# EAGLE board NitroxAnalyzer - Copie (EAGLE 7.3.0)
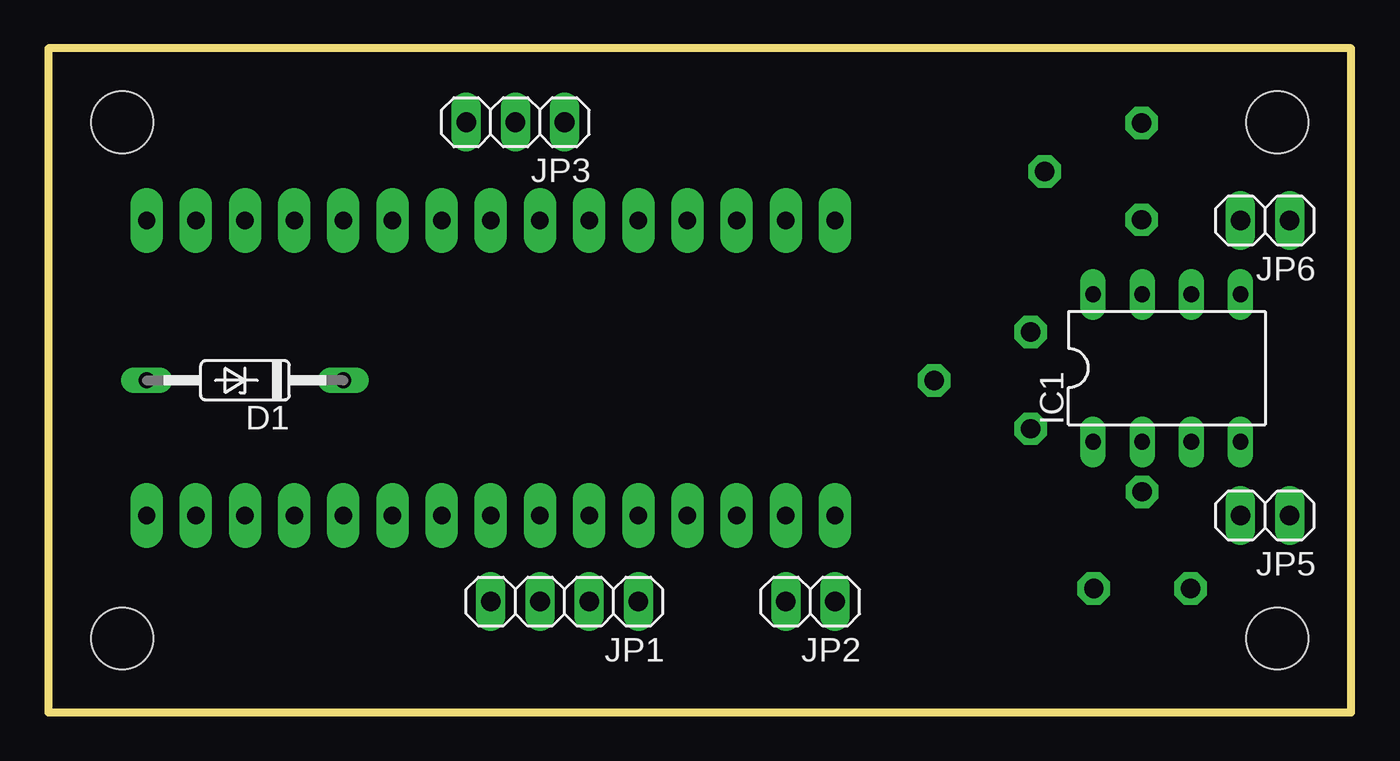
[diagram p0: board, top side]
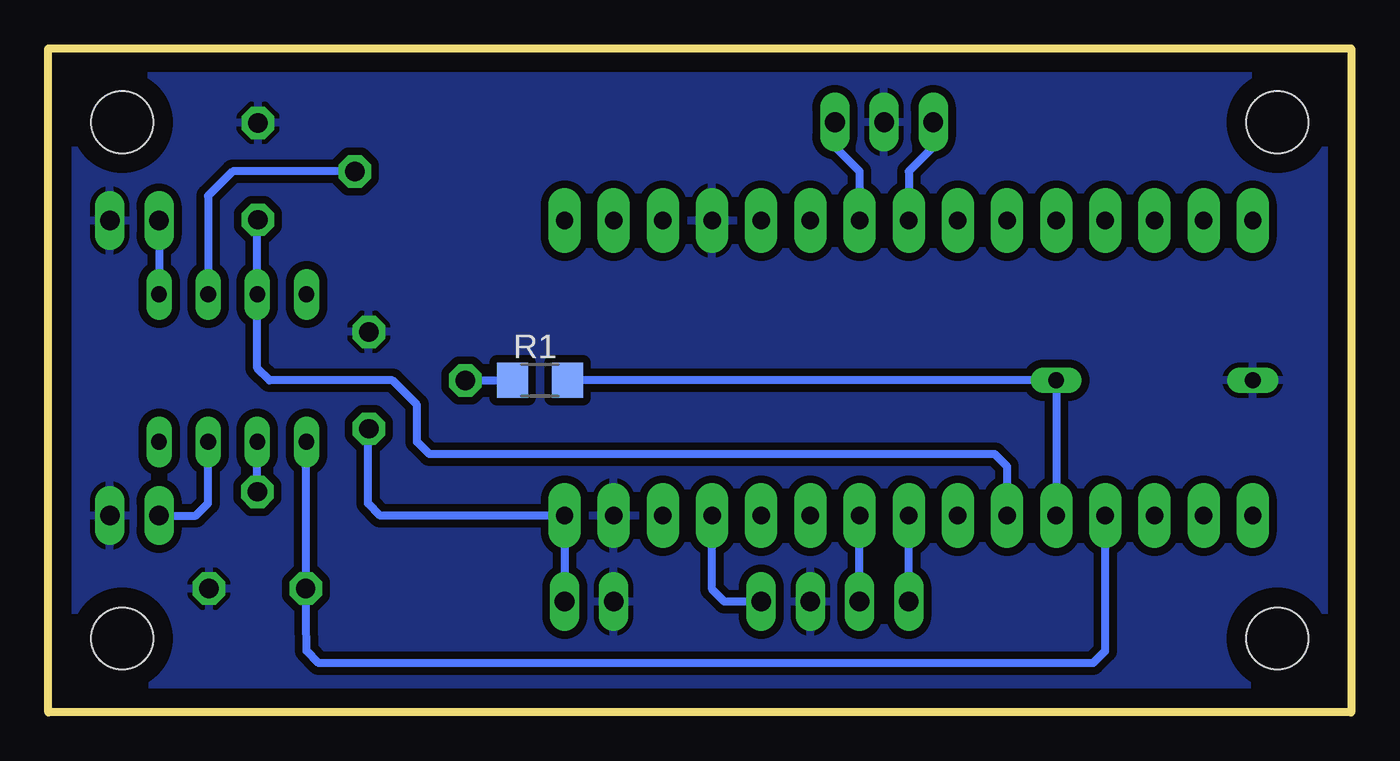
[diagram p1: board, bottom side, seen from below]

Size 67.31 x 34.29 mm. Coordinates in mm from the lower left corner, seen from the top.
Outline: 67.31,0 67.31,34.29 0,34.29 0,0 67.31,0
Copper layers (1*16): Top 0.035mm / dielectric 1.5mm / Bottom 0.035mm
Design rules "default *": minimum track width 10mil, minimum drill 24mil, track to track 16mil, track to pad 16mil, pad to pad 16mil, via to via 16mil, smd to smd 8mil, copper to edge 40mil, drill to drill 8mil, minimum pad ring 10mil, minimum via ring 8mil, stop-mask expansion 4mil, vias tented up to drill 0mil, thermal gap 10mil
Holes 3.2 mm at 3.81,30.48 3.81,3.81 63.5,3.81 63.5,30.48

## Footprints (pad centres in the part's own frame; a part is rotated, then mirrored left to right if it is on the bottom)
DO35Z10 = drill 0.813 long: A 5.08,0; C -5.08,0
DIL08 = drill 0.813 long: 1 -3.81,-3.81; 2 -1.27,-3.81; 3 1.27,-3.81; 4 3.81,-3.81; 5 3.81,3.81; 6 1.27,3.81; 7 -1.27,3.81; 8 -3.81,3.81
1X04 = drill 1.016 long: 1 -3.81,0; 2 -1.27,0; 3 1.27,0; 4 3.81,0
1X02 = drill 1.016 long: 1 -1.27,0; 2 1.27,0
1X03 = drill 1.016 long: 1 -2.54,0; 2 0,0; 3 2.54,0
R1206 = smd 1.6 x 1.803: 1 -1.422,0; 2 1.422,0
PT6KV = drill 1 pad 1.676 octagon: A -2.5,-2.5; B 2.5,-2.5; C 0,2.5
DIL30 = drill 0.9 pad 1.676 long: P$1 -7.62,17.78; P$2 -7.62,15.24; P$3 -7.62,12.7; P$4 -7.62,10.16; P$5 -7.62,7.62; P$6 -7.62,5.08; P$7 -7.62,2.54; P$8 -7.62,0; P$9 -7.62,-2.54; P$10 -7.62,-5.08; P$11 -7.62,-7.62; P$12 -7.62,-10.16; P$13 -7.62,-12.7; P$14 -7.62,-15.24; P$15 -7.62,-17.78; P$16 7.62,-17.78; P$17 7.62,-15.24; P$18 7.62,-12.7; P$19 7.62,-10.16; P$20 7.62,-7.62; P$21 7.62,-5.08; P$22 7.62,-2.54; P$23 7.62,0; P$24 7.62,2.54; P$25 7.62,5.08; P$26 7.62,7.62; P$27 7.62,10.16; P$28 7.62,12.7; P$29 7.62,15.24; P$30 7.62,17.78

## Placement (x,y rotation side)
D1  BZX55  [DO35Z10]  10.16,17.14 180 top
IC1  [DIL08]  57.78,17.78 0 top
JP1  OLED_CON  [1X04]  26.67,5.71 180 top
JP2  BAT_CON  [1X02]  39.37,5.71 180 top
JP3  BUTTONS_CON@1  [1X03]  24.13,30.48 180 top
JP5  O2_CELL_CON  [1X02]  62.87,10.16 180 top
JP6  FLUX_SENSOR_CON  [1X02]  62.87,25.4 180 top
R1  10k  [R1206]  41.91,17.14 0 bottom
U$1  PT6KV-10k  [PT6KV]  48.26,17.14 90 top
U$2  PT6KV-10k  [PT6KV]  56.52,8.89 0 top
U$3  PT6KV-10k  [PT6KV]  53.98,27.94 90 top
U$4  DIL30  [DIL30]  22.86,17.78 270 top

## Library data of the parts
D1 = diode
IC1 = linear
JP1-JP3 JP5 JP6 = pinhead
R1 = rcl
U$1-U$3 = piher
U$4 = ic-package

## Nets
+9V: JP2.1 U$1.A U$4.P$30
BATTERY_ANALOG: D1.C R1.2 U$4.P$20
CALIBRATE: JP3.3 U$4.P$8
FLUX_ANALOG: IC1.7 U$3.A U$4.P$21
FLUX_SIGNAL: IC1.5 JP6.2
GND: D1.A JP1.2 JP2.2 JP3.2 JP5.1 JP6.1 U$1.B U$2.B U$3.B U$4.P$4 U$4.P$29
N$1: R1.1 U$1.C
N$2: U$4.P$1
N$3: IC1.2 U$2.C
N$5: IC1.6 U$3.C
N$7: U$4.P$2
N$9: U$4.P$3
N$10: U$4.P$5
N$11: U$4.P$6
N$12: U$4.P$9
N$13: U$4.P$10
N$14: U$4.P$11
N$15: U$4.P$12
N$16: U$4.P$13
N$17: U$4.P$14
N$18: U$4.P$15
N$19: U$4.P$16
N$20: U$4.P$17
N$21: U$4.P$18
N$22: U$4.P$22
N$23: U$4.P$25
N$24: U$4.P$26
N$25: U$4.P$28
O2_CELL_ANALOG: IC1.1 U$2.A U$4.P$19
O2_SIGNAL: IC1.3 JP5.2
SCL: JP1.3 U$4.P$24
SDA: JP1.4 U$4.P$23
START: JP3.1 U$4.P$7
V+: IC1.8
V-: IC1.4
VCC: JP1.1 U$4.P$27

## Tracks (layer width: path | path; a pad name or v marks a point on that pad's centre or on a via)
+9V
  Bottom 0.406: U$1.A 50.8,14.61 50.8,10.79 50.16,10.16 U$4.P$30 JP2.1
BATTERY_ANALOG
  Bottom 0.406: R1.2 D1.C U$4.P$20
CALIBRATE
  Bottom 0.406: JP3.3 21.59,29.21 22.86,27.94 U$4.P$8
FLUX_ANALOG
  Bottom 0.406: U$3.A 56.52,24.77 IC1.7 56.26,21.08 56.52,20.83 56.52,17.78 55.88,17.14 49.53,17.14 48.26,15.88 48.26,13.97 47.62,13.34 18.41,13.34 17.78,12.7 U$4.P$21
FLUX_SIGNAL
  Bottom 0.406: JP6.2 IC1.5
GND
  pour Bottom: 1.27,-3.81 104.14,-3.81 104.14,36.83 -1.27,36.83
N$1
  Bottom 0.406: U$1.C R1.1
N$3
  Bottom 0.406: U$2.C IC1.2
N$5
  Bottom 0.406: U$3.C 57.78,27.94 59.05,26.67 IC1.6
O2_CELL_ANALOG
  Bottom 0.406: IC1.1 54.02,12.66 U$2.A 53.98,3.17 53.34,2.54 13.34,2.54 12.7,3.17 U$4.P$19
O2_SIGNAL
  Bottom 0.406: JP5.2 59.69,10.16 59.05,10.79 IC1.3
SCL
  Bottom 0.406: JP1.3 U$4.P$24
SDA
  Bottom 0.406: JP1.4 U$4.P$23
START
  Bottom 0.406: JP3.1 26.67,29.21 25.4,27.94 U$4.P$7
VCC
  Bottom 0.406: JP1.1 32.38,5.71 33.02,6.35 U$4.P$27